# EAGLE board pcb (EAGLE 6.1)
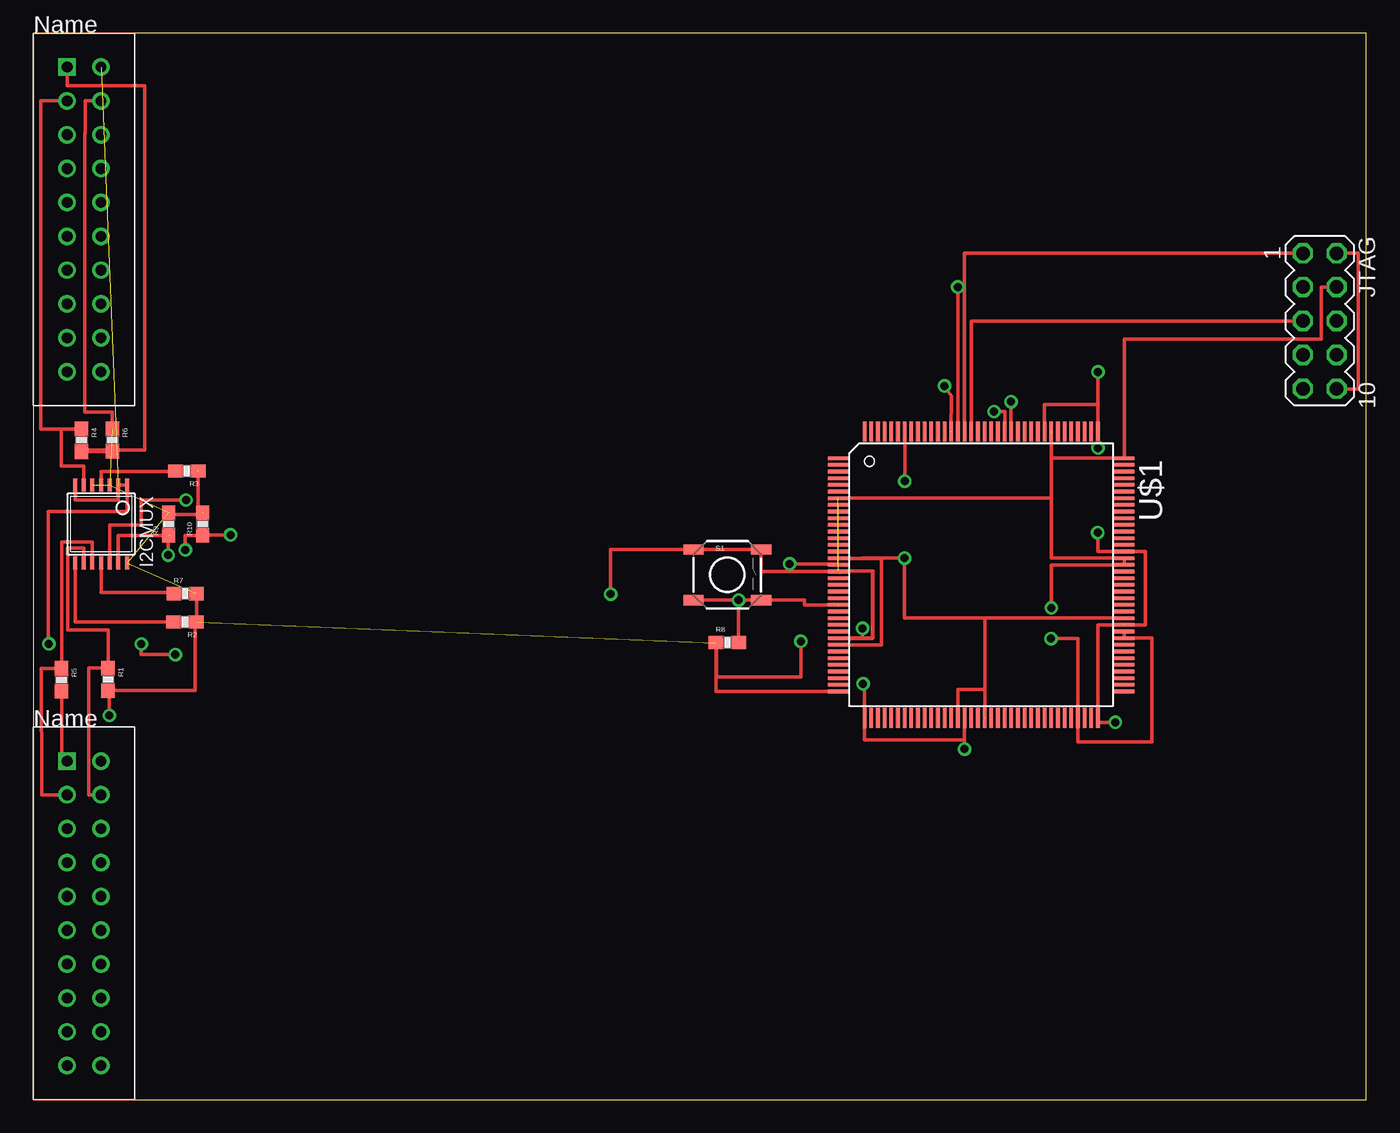
[diagram p0: board, top side]
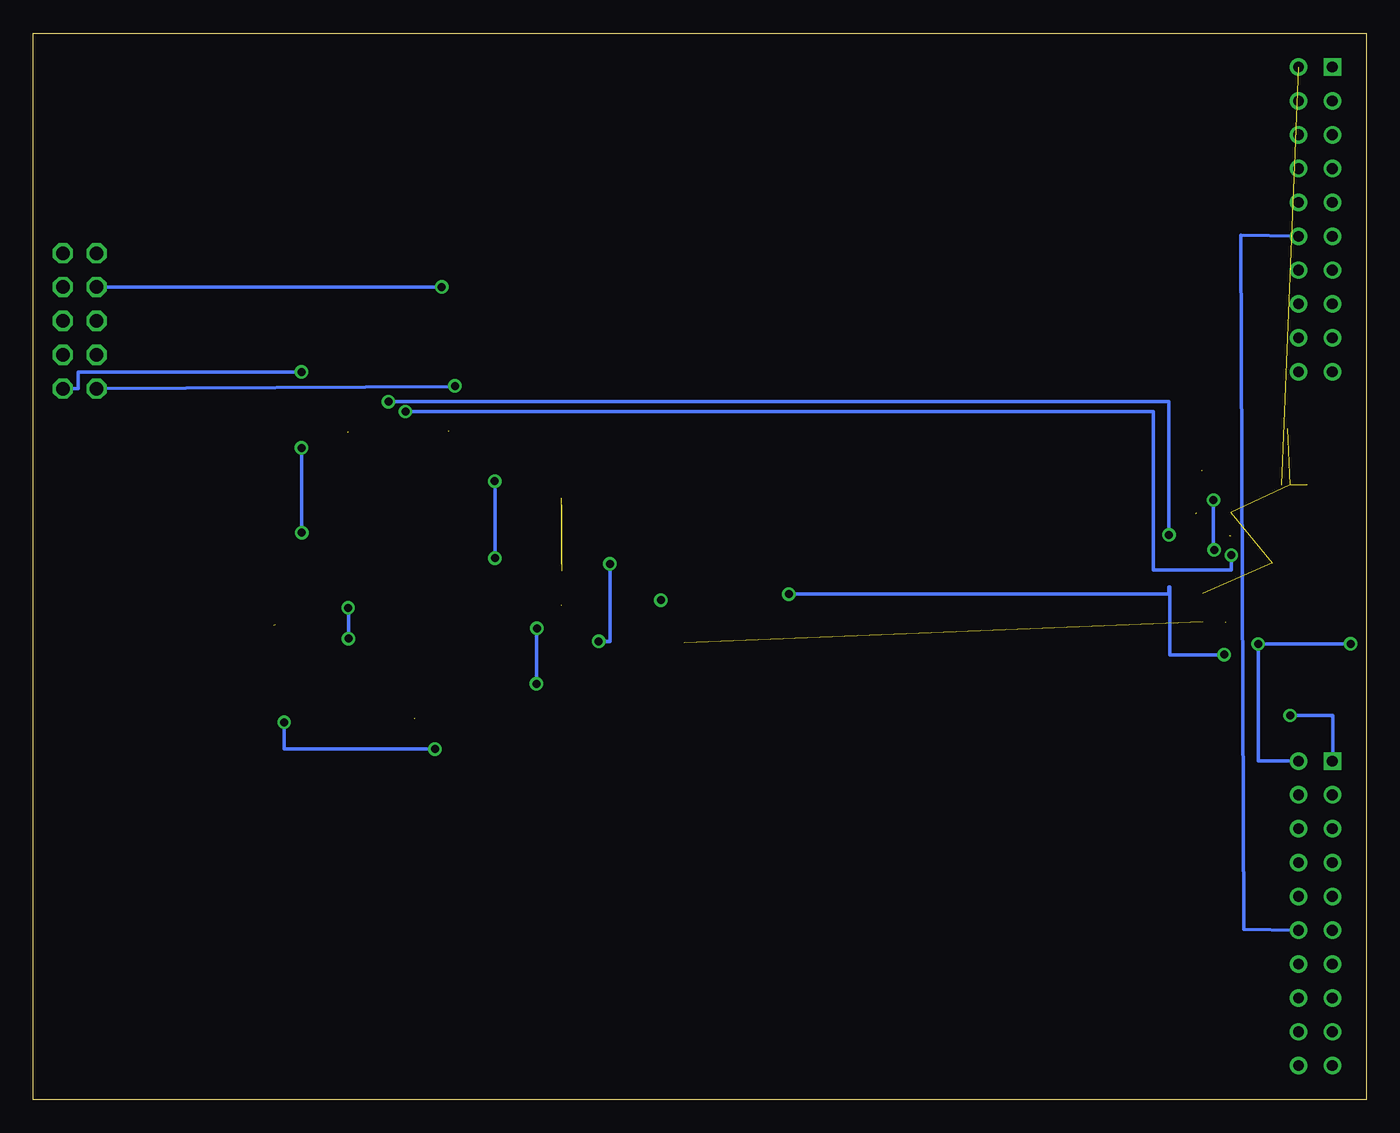
[diagram p1: board, bottom side, seen from below]

Size 100 x 80 mm. Coordinates in mm from the lower left corner, seen from the top.
Outline: 0,0 100,0 100,80 0,80 0,0
Copper layers (1*16): Top 0.035mm / dielectric 1.5mm / Bottom 0.035mm
Design rules: minimum track width 10mil, minimum drill 24mil, track to track 8mil, track to pad 8mil, pad to pad 8mil, via to via 8mil, smd to smd 8mil, copper to edge 40mil, drill to drill 8mil, minimum pad ring 10mil, minimum via ring 8mil, stop-mask expansion 4mil, vias tented up to drill 0mil, thermal gap 10mil

## Footprints (pad centres in the part's own frame; a part is rotated, then mirrored left to right if it is on the bottom)
TSSOP14 = smd 0.305 x 0.991: 1 -1.95,-2.918; 2 -1.3,-2.918; 3 -0.65,-2.918; 4 0,-2.918; 5 0.65,-2.918; 6 1.3,-2.918; 7 1.95,-2.918; 8 1.95,2.918; 9 1.3,2.918; 10 0.65,2.918; 11 0,2.918; 12 -0.65,2.918; 13 -1.3,2.918; 14 -1.95,2.918
MA05-2 = drill 1.016 octagon: 1 -5.08,-1.27; 2 -5.08,1.27; 3 -2.54,-1.27; 4 -2.54,1.27; 5 0,-1.27; 6 0,1.27; 7 2.54,-1.27; 8 2.54,1.27; 9 5.08,-1.27; 10 5.08,1.27
OV7670 = drill 0.8 square: 3V3 0,0 | drill 0.8: D0 0,-15.24; D1 2.54,-15.24; D2 0,-17.78; D3 2.54,-17.78; D4 0,-20.32; D5 2.54,-20.32; D6 0,-22.86; D7 2.54,-22.86; GND 2.54,0; GND2 2.54,-12.7; NOE 2.54,-10.16; RCLK 0,-12.7; RRST 0,-10.16; SCL 0,-2.54; SDA 2.54,-2.54; VSYNC 0,-5.08; WEN 0,-7.62; WRST 2.54,-5.08; XCLK 2.54,-7.62
0603-RES = smd 1.1 x 1: 1 -0.85,0; 2 0.85,0
TACTILE_SWITCH_SMD = smd 1.524 x 0.762: 1 -2.54,1.905; 2 2.54,1.905; 3 -2.54,-1.905; 4 2.54,-1.905
VQFP144 = smd 0.27 x 1.5: 1 -8.75,-12.02; 2 -8.25,-12.02; 3 -7.75,-12.02; 4 -7.25,-12.02; 5 -6.75,-12.02; 6 -6.25,-12.02; 7 -5.75,-12.02; 8 -5.25,-12.02; 9 -4.75,-12.02; 10 -4.25,-12.02; 11 -3.75,-12.02; 12 -3.25,-12.02; 13 -2.75,-12.02; 14 -2.25,-12.02; 15 -1.75,-12.02; 16 -1.25,-12.02; 17 -0.75,-12.02; 18 -0.25,-12.02; 19 0.25,-12.02; 20 0.75,-12.02; 21 1.25,-12.02; 22 1.75,-12.02; 23 2.25,-12.02; 24 2.75,-12.02; 25 3.25,-12.02; 26 3.75,-12.02; 27 4.25,-12.02; 28 4.75,-12.02; 29 5.25,-12.02; 30 5.75,-12.02; 31 6.25,-12.02; 32 6.75,-12.02; 33 7.25,-12.02; 34 7.75,-12.02; 35 8.25,-12.02; 36 8.75,-12.02; 73 8.75,9.48; 74 8.25,9.48; 75 7.75,9.48; 76 7.25,9.48; 77 6.75,9.48; 78 6.25,9.48; 79 5.75,9.48; 80 5.25,9.48; 81 4.75,9.48; 82 4.25,9.48; 83 3.75,9.48; 84 3.25,9.48; 85 2.75,9.48; 86 2.25,9.48; 87 1.75,9.48; 88 1.25,9.48; 89 0.75,9.48; 90 0.25,9.48; 91 -0.25,9.48; 92 -0.75,9.48; 93 -1.25,9.48; 94 -1.75,9.48; 95 -2.25,9.48; 96 -2.75,9.48; 97 -3.25,9.48; 98 -3.75,9.48; 99 -4.25,9.48; 100 -4.75,9.48; 101 -5.25,9.48; 102 -5.75,9.48; 103 -6.25,9.48; 104 -6.75,9.48; 105 -7.25,9.48; 106 -7.75,9.48; 107 -8.25,9.48; 108 -8.75,9.48 | smd 1.5 x 0.27: 37 10.75,-10.02; 38 10.75,-9.52; 39 10.75,-9.02; 40 10.75,-8.52; 41 10.75,-8.02; 42 10.75,-7.52; 43 10.75,-7.02; 44 10.75,-6.52; 45 10.75,-6.02; 46 10.75,-5.52; 47 10.75,-5.02; 48 10.75,-4.52; 49 10.75,-4.02; 50 10.75,-3.52; 51 10.75,-3.02; 52 10.75,-2.52; 53 10.75,-2.02; 54 10.75,-1.52; 55 10.75,-1.02; 56 10.75,-0.52; 57 10.75,-0.02; 58 10.75,0.48; 59 10.75,0.98; 60 10.75,1.48; 61 10.75,1.98; 62 10.75,2.48; 63 10.75,2.98; 64 10.75,3.48; 65 10.75,3.98; 66 10.75,4.48; 67 10.75,4.98; 68 10.75,5.48; 69 10.75,5.98; 70 10.75,6.48; 71 10.75,6.98; 72 10.75,7.48; 109 -10.75,7.48; 110 -10.75,6.98; 111 -10.75,6.48; 112 -10.75,5.98; 113 -10.75,5.48; 114 -10.75,4.98; 115 -10.75,4.48; 116 -10.75,3.98; 117 -10.75,3.48; 118 -10.75,2.98; 119 -10.75,2.48; 120 -10.75,1.98; 121 -10.75,1.48; 122 -10.75,0.98; 123 -10.75,0.48; 124 -10.75,-0.02; 125 -10.75,-0.52; 126 -10.75,-1.02; 127 -10.75,-1.52; 128 -10.75,-2.02; 129 -10.75,-2.52; 130 -10.75,-3.02; 131 -10.75,-3.52; 132 -10.75,-4.02; 133 -10.75,-4.52; 134 -10.75,-5.02; 135 -10.75,-5.52; 136 -10.75,-6.02; 137 -10.75,-6.52; 138 -10.75,-7.02; 139 -10.75,-7.52; 140 -10.75,-8.02; 141 -10.75,-8.52; 142 -10.75,-9.02; 143 -10.75,-9.52; 144 -10.75,-10.02

## Placement (x,y rotation side)
I2CMUX  PCA9542A  [TSSOP14]  5.08,43.18 180 top
JTAG  [MA05-2]  96.52,58.42 270 top
OV0  OV7670  [OV7670]  2.54,77.47 0 top
OV1  OV7670  [OV7670]  2.54,25.4 0 top
R1  4k7  [0603-RES]  5.61,31.52 270 top
R2  4k7  [0603-RES]  11.37,35.83 180 top
R3  4k7  [0603-RES]  11.52,47.16 180 top
R4  4k7  [0603-RES]  3.61,49.47 270 top
R5  4k7  [0603-RES]  2.12,31.49 270 top
R6  4k7  [0603-RES]  5.93,49.48 270 top
R7  4k7  [0603-RES]  11.4,37.96 0 top
R8  10k  [0603-RES]  52.07,34.29 0 top
R9  4k7  [0603-RES]  10.16,43.18 90 top
R10  4k7  [0603-RES]  12.7,43.18 90 top
S1  [TACTILE_SWITCH_SMD]  52.07,39.37 0 top
U$1  AVR32UC3AVQFP144  [VQFP144]  72.39,39.37 270 top

## Library data of the parts
I2CMUX OV0 OV1 = seblov
JTAG = con-lstb; OC_FARNELL: unknown; OC_NEWARK: unknown
R1-R10 S1 = SparkFun
U$1 = avr32uca

## Nets
+3V3: I2CMUX.3 I2CMUX.5 I2CMUX.14 JTAG.4 OV0.SDA OV1.3V3 R1.2 R2.1 R3.1 R5.2 R6.1 R7.2 R8.1 R9.2 R10.2 U$1.7 U$1.17 U$1.36 U$1.69 U$1.81 U$1.82 U$1.92 U$1.93 U$1.108 U$1.116
GND: I2CMUX.1 I2CMUX.2 I2CMUX.7 JTAG.2 JTAG.10 OV0.GND OV1.GND S1.1 S1.2 U$1.8 U$1.18 U$1.28 U$1.37 U$1.52 U$1.72 U$1.83 U$1.94 U$1.109 U$1.117
GND2: OV0.GND2 OV1.GND2
N$1: I2CMUX.6 OV0.SCL R4.1
N$2: U$1.16 U$1.29 U$1.51 U$1.55 U$1.84 U$1.138
N$3: OV0.3V3 R4.2 R6.2
N$4: R8.2 S1.3 S1.4 U$1.23
N$5: I2CMUX.9 OV1.SDA R1.1
N$6: I2CMUX.10 OV1.SCL R5.1
N$7: JTAG.1 U$1.129
N$8: JTAG.3 U$1.130
N$9: JTAG.5 U$1.128
N$10: I2CMUX.8 R2.2
N$11: I2CMUX.4 R3.2
N$12: JTAG.9 U$1.131
N$13: I2CMUX.11 R7.1
OV1DATA0: OV1.D0
OV1DATA1: OV1.D1
OV1DATA2: OV1.D2
OV1DATA3: OV1.D3
OV1DATA4: OV1.D4
OV1DATA5: OV1.D5
OV1DATA6: OV1.D6
OV1DATA7: OV1.D7
OVDATA0: OV0.D0
OVDATA1: OV0.D1
OVDATA2: OV0.D2
OVDATA3: OV0.D3
OVDATA4: OV0.D4
OVDATA5: OV0.D5
OVDATA6: OV0.D6
OVDATA7: OV0.D7
SCL: I2CMUX.12 R10.1 U$1.122
SDA: I2CMUX.13 R9.1 U$1.123

## Tracks (layer width: path | path; a pad name or v marks a point on that pad's centre or on a via)
+3V3  (via drill 0.6 pad 0.25)  (10 unrouted)
  Top 0.254: R7.2 12.25,35.83 R2.1 12.16,35.83 12.16,30.68 R1.2 5.7,30.67 v5.7,28.82 | OV1.3V3 2.12,25.4 R5.2 2.12,25.44 v2.52,25.44 | 76.38,48.62 76.38,48.12 U$1.108 81.87,57.06 96.62,57.06 96.62,60.96 JTAG.4 | 76.38,48.62 76.38,50.06 | U$1.7 76.38,45.12 | 76.38,45.12 76.38,48.62 | 76.38,45.12 76.38,40.62 80.08,40.62 U$1.93 U$1.92 76.38,40.12 v76.38,36.9 | U$1.82 U$1.81 83.92,34.62 83.92,26.84 78.36,26.84 U$1.69 78.37,34.58 v76.36,34.58 | 51.2,34.26 51.2,30.62 U$1.36 51.22,30.62 R8.1 | 51.2,34.26 51.28,34.26 51.28,34.3 | 51.2,34.26 51.24,34.26 51.24,31.7 57.58,31.7 v57.58,34.38 | v56.74,40.2 60.37,40.2 U$1.17 | R10.2 12.37,44.03 12.37,47.18 12.32,47.18 | R9.2 10.16,43.9 12.9,43.9 12.9,44 12.74,44 12.46,44 12.46,43.96 12.8,43.96 | OV0.SDA 3.9,74.93 3.9,72.46 3.84,72.46 3.84,51.58 5.93,51.58 R6.1
  Bottom 0.254: v76.38,36.9 76.36,36.9 v76.36,34.58 | v57.58,34.38 56.74,34.38 v56.74,40.2 | v2.52,25.44 2.52,28.82 v5.7,28.82
GND  (via drill 0.6 pad 0.25)  (3 unrouted)
  Top 0.254: I2CMUX.7 3.13,44.99 3.18,44.99 6.38,44.99 I2CMUX.2 I2CMUX.1 7.03,44.12 1.12,44.12 1.12,34.2 v1.16,34.2 | JTAG.2 99.4,63.5 99.4,53.3 97.79,53.3 JTAG.10 | v79.88,54.6 79.87,52.82 U$1.109 | U$1.109 | U$1.109 79.88,52.14 75.87,52.14 U$1.117 | U$1.109 | U$1.109 v79.88,48.9 | v79.86,42.54 79.86,41.12 U$1.94 83.42,41.12 83.42,35.6 82.38,35.6 82.38,35.64 81.87,35.64 U$1.83 | 82.08,35.62 81.98,35.62 79.87,35.62 U$1.72 79.87,28.3 v81.18,28.3 | U$1.52 | U$1.52 69.86,26.98 62.37,26.98 U$1.37 62.37,31.2 v62.26,31.2 | U$1.52 v69.86,26.3 | 60.5,39.54 60.5,39.64 60.52,39.64 62.98,39.64 62.98,34.62 U$1.28 60.37,34.6 62.94,34.6 | 62.94,34.6 62.94,39.66 60.37,39.66 U$1.18 54.61,39.62 S1.2 S1.1 43.32,41.27 v43.32,37.92 | 62.94,34.6 62.22,34.6 v62.22,35.36 | v8.1,34.18 8.1,33.38 v10.66,33.38
  Bottom 0.254: JTAG.10 96.62,53.34 96.62,54.6 79.9,54.6 v79.88,54.6 | v79.88,48.9 79.86,48.9 v79.86,42.54 | v69.86,26.3 81.18,26.3 v81.18,28.3 | v62.22,35.36 62.26,35.36 v62.26,31.2 | v1.16,34.2 1.16,34.18 v8.1,34.18 8.1,25.4 OV1.GND | v10.66,33.38 10.66,33.36 14.72,33.36 14.72,38.44 14.8,38.44 14.8,37.92 v43.32,37.92
GND2
  Bottom 0.254: OV1.GND2 9.18,12.78 9.4,64.85 OV0.GND2
N$1
  Top 0.254: I2CMUX.6 3.78,47.54 2.11,47.54 2.11,50.3 3.67,50.3 3.67,50.34 | 3.67,50.34 3.61,50.34 | 3.67,50.34 3.67,50.32 R4.1 | 3.67,50.34 3.67,50.31 0.54,50.31 0.54,74.93 OV0.SCL
N$2  (via drill 0.6 pad 0.25)  (1 unrouted)
  Top 0.254: U$1.29 63.64,34.12 63.62,40.6 | 63.62,40.6 60.37,40.6 U$1.16 | U$1.138 v65.38,46.4 | 63.62,40.6 62.22,40.62 v65.36,40.62 65.36,36.12 71.38,36.12 | U$1.84 71.38,36.12 | 71.38,36.12 71.38,30.74 | 71.38,30.74 71.38,28.58 | U$1.51 69.36,30.78 71.38,30.78 71.38,30.74
  Bottom 0.254: v65.38,46.4 65.36,46.4 v65.36,40.62
N$3
  Top 0.254: R4.2 3.61,48.65 | 3.61,48.65 5.96,48.65 | 3.61,48.65 R4.2 R6.2 | 3.61,48.65 3.61,48.74 8.36,48.74 8.36,76.08 7.82,76.08 2.54,76.08 OV0.3V3
N$4  (via drill 0.6 pad 0.25)  (1 unrouted)
  Top 0.254: S1.3 v52.92,37.47 | v52.92,37.47 53.21,37.47 | 53.21,37.47 S1.4 57.84,37.47 57.84,37.1 60.42,37.1 60.42,37.12 | R8.2 v52.92,37.47 | v52.92,37.47 53.21,37.47
N$5
  Top 0.254: I2CMUX.9 3.78,41.37 2.59,41.37 2.59,35.23 5.64,35.23 5.64,32.37 R1.1 4.16,32.37 4.16,22.85 OV1.SDA
N$6
  Top 0.254: I2CMUX.10 4.42,40.26 4.42,41.81 2.12,41.81 R5.1 0.6,32.35 0.62,22.86 2.54,22.84 OV1.SCL
N$7
  Top 0.254: JTAG.1 69.87,63.5 U$1.129
N$8  (via drill 0.6 pad 0.25)
  Top 0.254: v69.36,60.96 69.36,50.86 69.38,50.62 U$1.130
  Bottom 0.254: JTAG.3 69.36,60.94 v69.36,60.96
N$9
  Top 0.254: JTAG.5 70.37,58.42 U$1.128
N$10  (1 unrouted)
  Top 0.254: I2CMUX.8 3.13,35.82 10.56,35.82
N$11
  Top 0.254: R3.2 10.66,47.12 5.1,47.12 5.1,46.1 I2CMUX.4
N$12  (via drill 0.6 pad 0.25)  (1 unrouted)
  Top 0.254: v68.36,53.54 68.88,52.78 68.86,50.16
  Bottom 0.254: JTAG.9 68.36,53.5 v68.36,53.54
N$13
  Top 0.254: R7.1 10.55,38.05 5.11,38.05 5.11,40.26 I2CMUX.11
SCL  (via drill 0.6 pad 0.25)
  Top 0.254: U$1.122 v73.36,52.36 | v14.8,42.36 12.7,42.36 R10.1 11.46,42.33 11.4,42.33 v11.4,41.24 | v11.46,44.98 8.08,44.98 8.08,43.12 5.73,43.12 I2CMUX.12
  Bottom 0.254: v73.36,52.36 14.8,52.36 v14.8,42.36 | v11.46,44.98 11.46,42.33 11.46,41.24 v11.4,41.24
SDA  (via drill 0.6 pad 0.25)  (1 unrouted)
  Top 0.254: U$1.123 72.88,51.62 v72.08,51.62 | v10.12,40.84 10.1,40.84 10.1,42.22 10.28,42.22 10.28,42.32 | I2CMUX.13 6.38,42.33 R9.1
  Bottom 0.254: v72.08,51.62 15.98,51.62 15.98,39.72 10.12,39.72 v10.12,40.84